# EAGLE board ARD-SAFE (EAGLE 9.7.0)

Size 338.33 x 163.28 mm. Coordinates in mm from the lower left corner, seen from the top.
Outline: 0,0 338.33,0 338.33,163.28 0,163.28 0,0
Copper layers (1*16): Top 0.035mm / dielectric 1.5mm / Bottom 0.035mm
Design rules "default": minimum track width 6mil, minimum drill 0.35mm, track to track 6mil, track to pad 6mil, pad to pad 6mil, via to via 6mil, smd to smd 6mil, copper to edge 40mil, drill to drill 6mil, minimum pad ring 10mil, minimum via ring 8mil, stop-mask expansion 4mil, vias tented up to drill 0mil, thermal gap 10mil

## Footprints (pad centres in the part's own frame; a part is rotated, then mirrored left to right if it is on the bottom)
HC-SR04 = drill 1.016 long: 1 -3.81,0; 2 -1.27,0; 3 1.27,0; 4 3.81,0
1X08 = drill 1.016 long: 1 -8.89,0; 2 -6.35,0; 3 -3.81,0; 4 -1.27,0; 5 1.27,0; 6 3.81,0; 7 6.35,0; 8 8.89,0
RESAD1016W63L850D250B = drill 0.83 pad 1.43: 1 -5.08,0; 2 5.08,0
JHD-162A = drill 1.016 long: 1 -19.05,0; 2 -16.51,0; 3 -13.97,0; 4 -11.43,0; 5 -8.89,0; 6 -6.35,0; 7 -3.81,0; 8 -1.27,0; 9 1.27,0; 10 3.81,0; 11 6.35,0; 12 8.89,0; 13 11.43,0; 14 13.97,0; 15 16.51,0; 16 19.05,0
ARDUINO-UNO-R3-SHIELD = drill 1.016 pad 1.88: 3.3V 24.13,-2.54; 5V 24.13,0; A0 24.13,12.7; A1 24.13,15.24; A2 24.13,17.78; A3 24.13,20.32; A4 24.13,22.86; A5 24.13,25.4; AREF -24.13,-13.97; D2 -24.13,20.32; D3 -24.13,17.78; D4 -24.13,15.24; D5 -24.13,12.7; D6 -24.13,10.16; D7 -24.13,7.62; D8 -24.13,3.81; D9 -24.13,1.27; D10 -24.13,-1.27; D11 -24.13,-3.81; D12 -24.13,-6.35; D13 -24.13,-8.89; GND@0 24.13,2.54; GND@1 24.13,5.08; GND@2 -24.13,-11.43; IOREF 24.13,-7.62; NC 24.13,-10.16; RES 24.13,-5.08; RX -24.13,25.4; SCL -24.13,-19.05; SDA -24.13,-16.51; TX -24.13,22.86; VIN 24.13,7.62

## Placement (x,y rotation side)
DIST1  DISTANCE-SENSOR-4PINHC-SR04  [HC-SR04]  73.25,35 0 top
KEYPAD1  KEYPAD-4X4  [1X08]  324.99,114.69 0 top
R2  221  [RESAD1016W63L850D250B]  196.27,61.9 90 top
U1  LCD-16X2JHD-162A  [JHD-162A]  179.76,36.63 0 top
UMASTER  ARDUINO-UNO-R3-SHIELD  [ARDUINO-UNO-R3-SHIELD]  174.65,133.43 90 top
USLAVE  ARDUINO-UNO-R3-SHIELD  [ARDUINO-UNO-R3-SHIELD]  47.88,132.42 270 top

## Library data of the parts
DIST1 KEYPAD1 R2 U1 UMASTER USLAVE = Tinkercad

## Nets
U1_LED+: R2.1 U1.15
UMASTER_5V: R2.2 U1.2 UMASTER.5V
UMASTER_D2: KEYPAD1.8 U1.14 UMASTER.D2
UMASTER_D3: KEYPAD1.7 U1.13 UMASTER.D3
UMASTER_D4: KEYPAD1.6 U1.12 UMASTER.D4
UMASTER_D5: KEYPAD1.5 U1.11 UMASTER.D5
UMASTER_D6: KEYPAD1.4 UMASTER.D6
UMASTER_D7: KEYPAD1.3 UMASTER.D7
UMASTER_D8: KEYPAD1.2 UMASTER.D8
UMASTER_D9: KEYPAD1.1 UMASTER.D9
UMASTER_D11: U1.6 UMASTER.D11
UMASTER_D12: U1.4 UMASTER.D12
USLAVE_5V: DIST1.1 USLAVE.5V
USLAVE_A4: UMASTER.A4 USLAVE.A4
USLAVE_A5: UMASTER.A5 USLAVE.A5
USLAVE_D2: DIST1.2 USLAVE.D2
USLAVE_D3: DIST1.3 USLAVE.D3
USLAVE_GND: DIST1.4 U1.1 U1.3 U1.5 U1.16 UMASTER.GND@0 UMASTER.GND@1 UMASTER.GND@2 USLAVE.GND@0 USLAVE.GND@1 USLAVE.GND@2

## Tracks (layer width: path | path; a pad name or v marks a point on that pad's centre or on a via)
U1_LED+  (1 unrouted)
UMASTER_5V  (2 unrouted)
UMASTER_D2  (2 unrouted)
UMASTER_D3  (2 unrouted)
UMASTER_D4  (2 unrouted)
UMASTER_D5  (2 unrouted)
UMASTER_D6  (1 unrouted)
UMASTER_D7  (1 unrouted)
UMASTER_D8  (1 unrouted)
UMASTER_D9  (1 unrouted)
UMASTER_D11  (1 unrouted)
UMASTER_D12  (1 unrouted)
USLAVE_5V  (1 unrouted)
USLAVE_A4  (1 unrouted)
USLAVE_A5  (1 unrouted)
USLAVE_D2  (1 unrouted)
USLAVE_D3  (1 unrouted)
USLAVE_GND  (10 unrouted)